# Altium PCB SpeakEasy_Power.PcbDoc
Units mil, origin at the board's own origin, x right, y up, seen from the top; angles counter-clockwise.
Board outline 3149.61 x 3149.61 mil, 2 copper layers (Top Layer, Bottom Layer), stack 62.8 mil thick; 38 components, 27 nets, 143 pads, 185 vias.
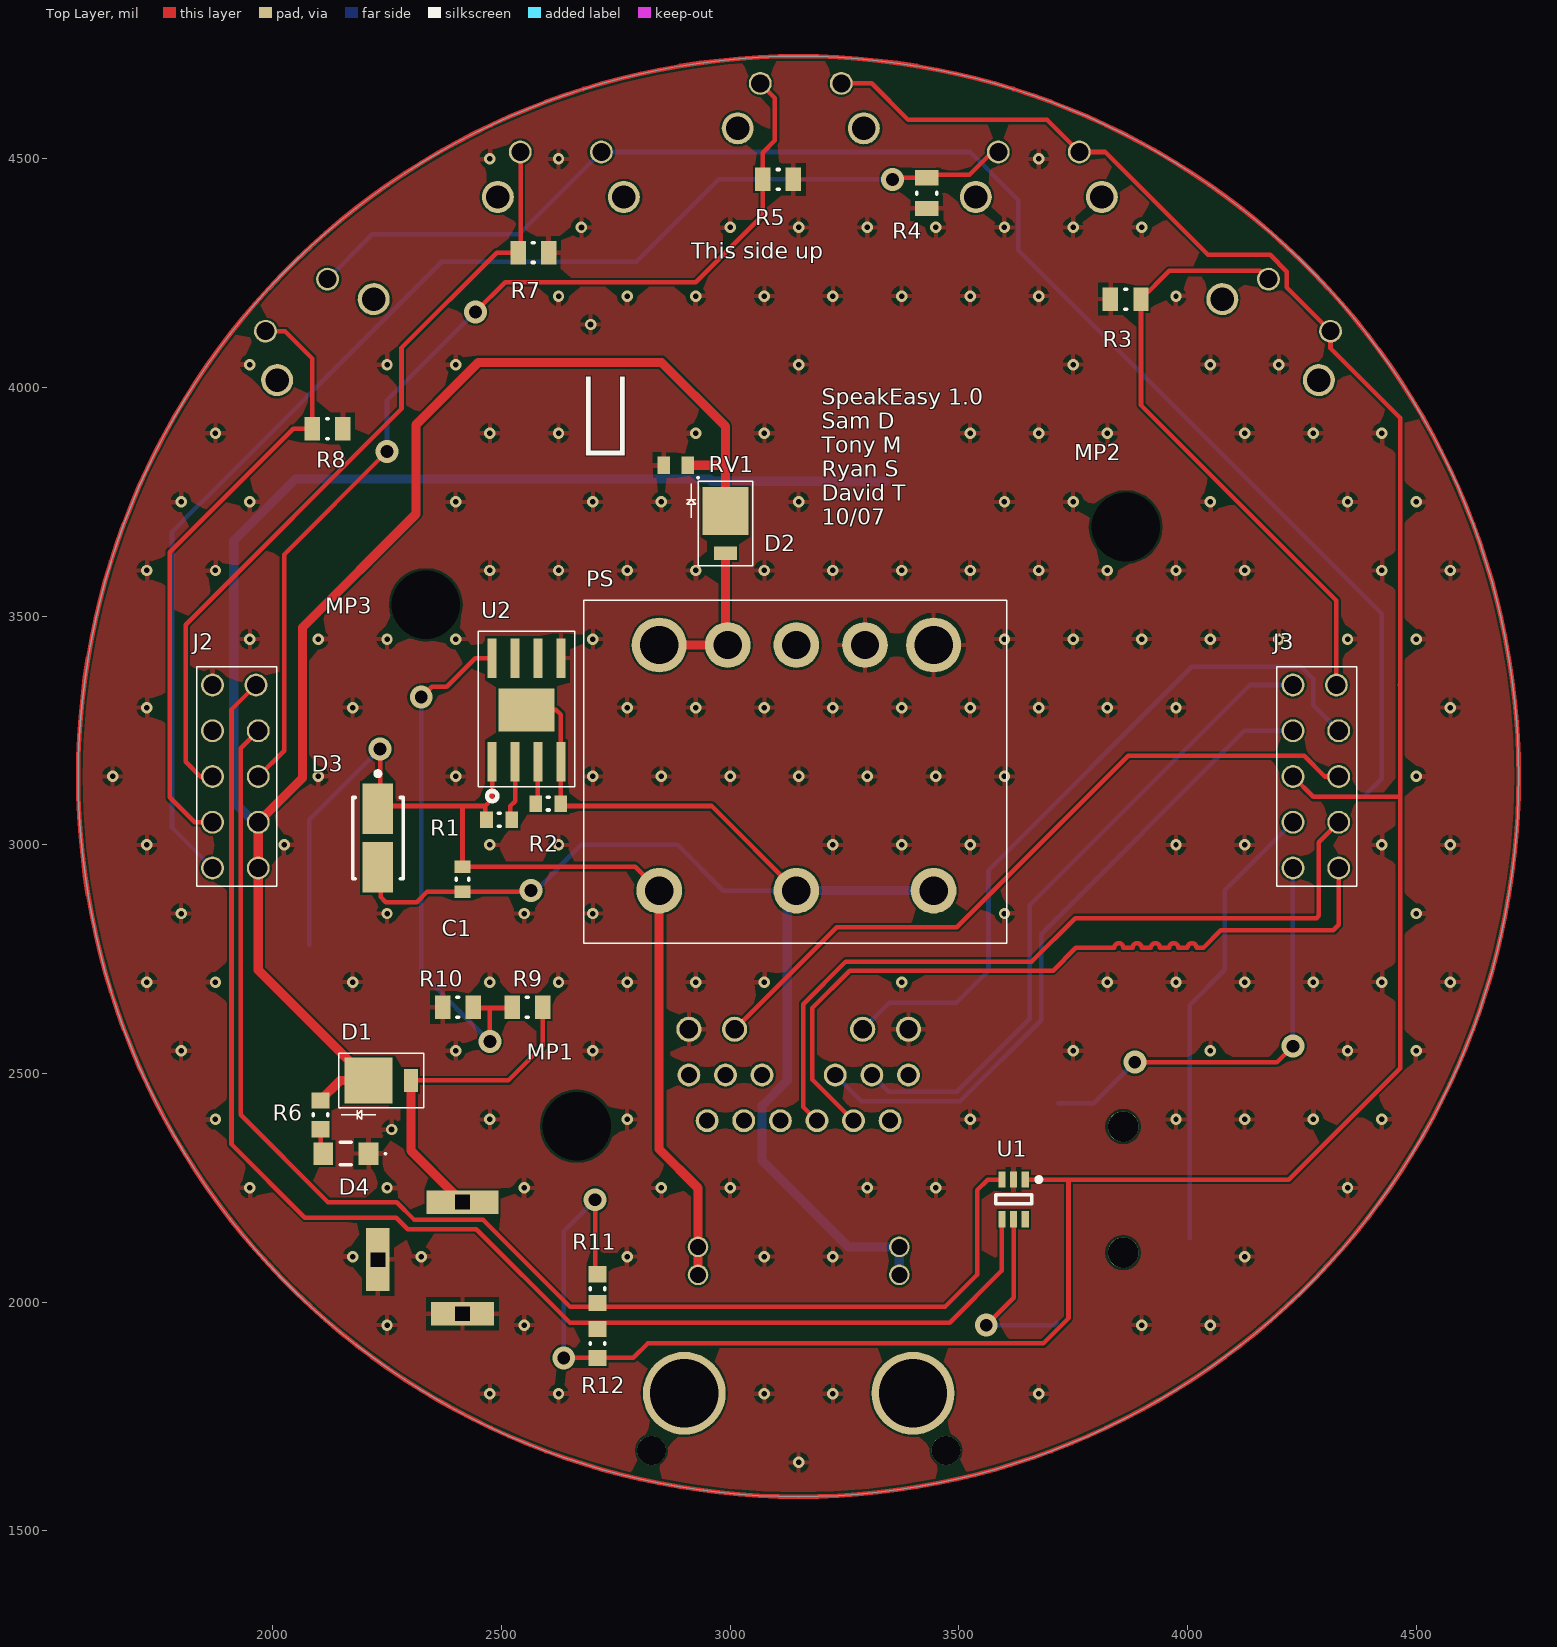
[diagram p0: Top Layer view]
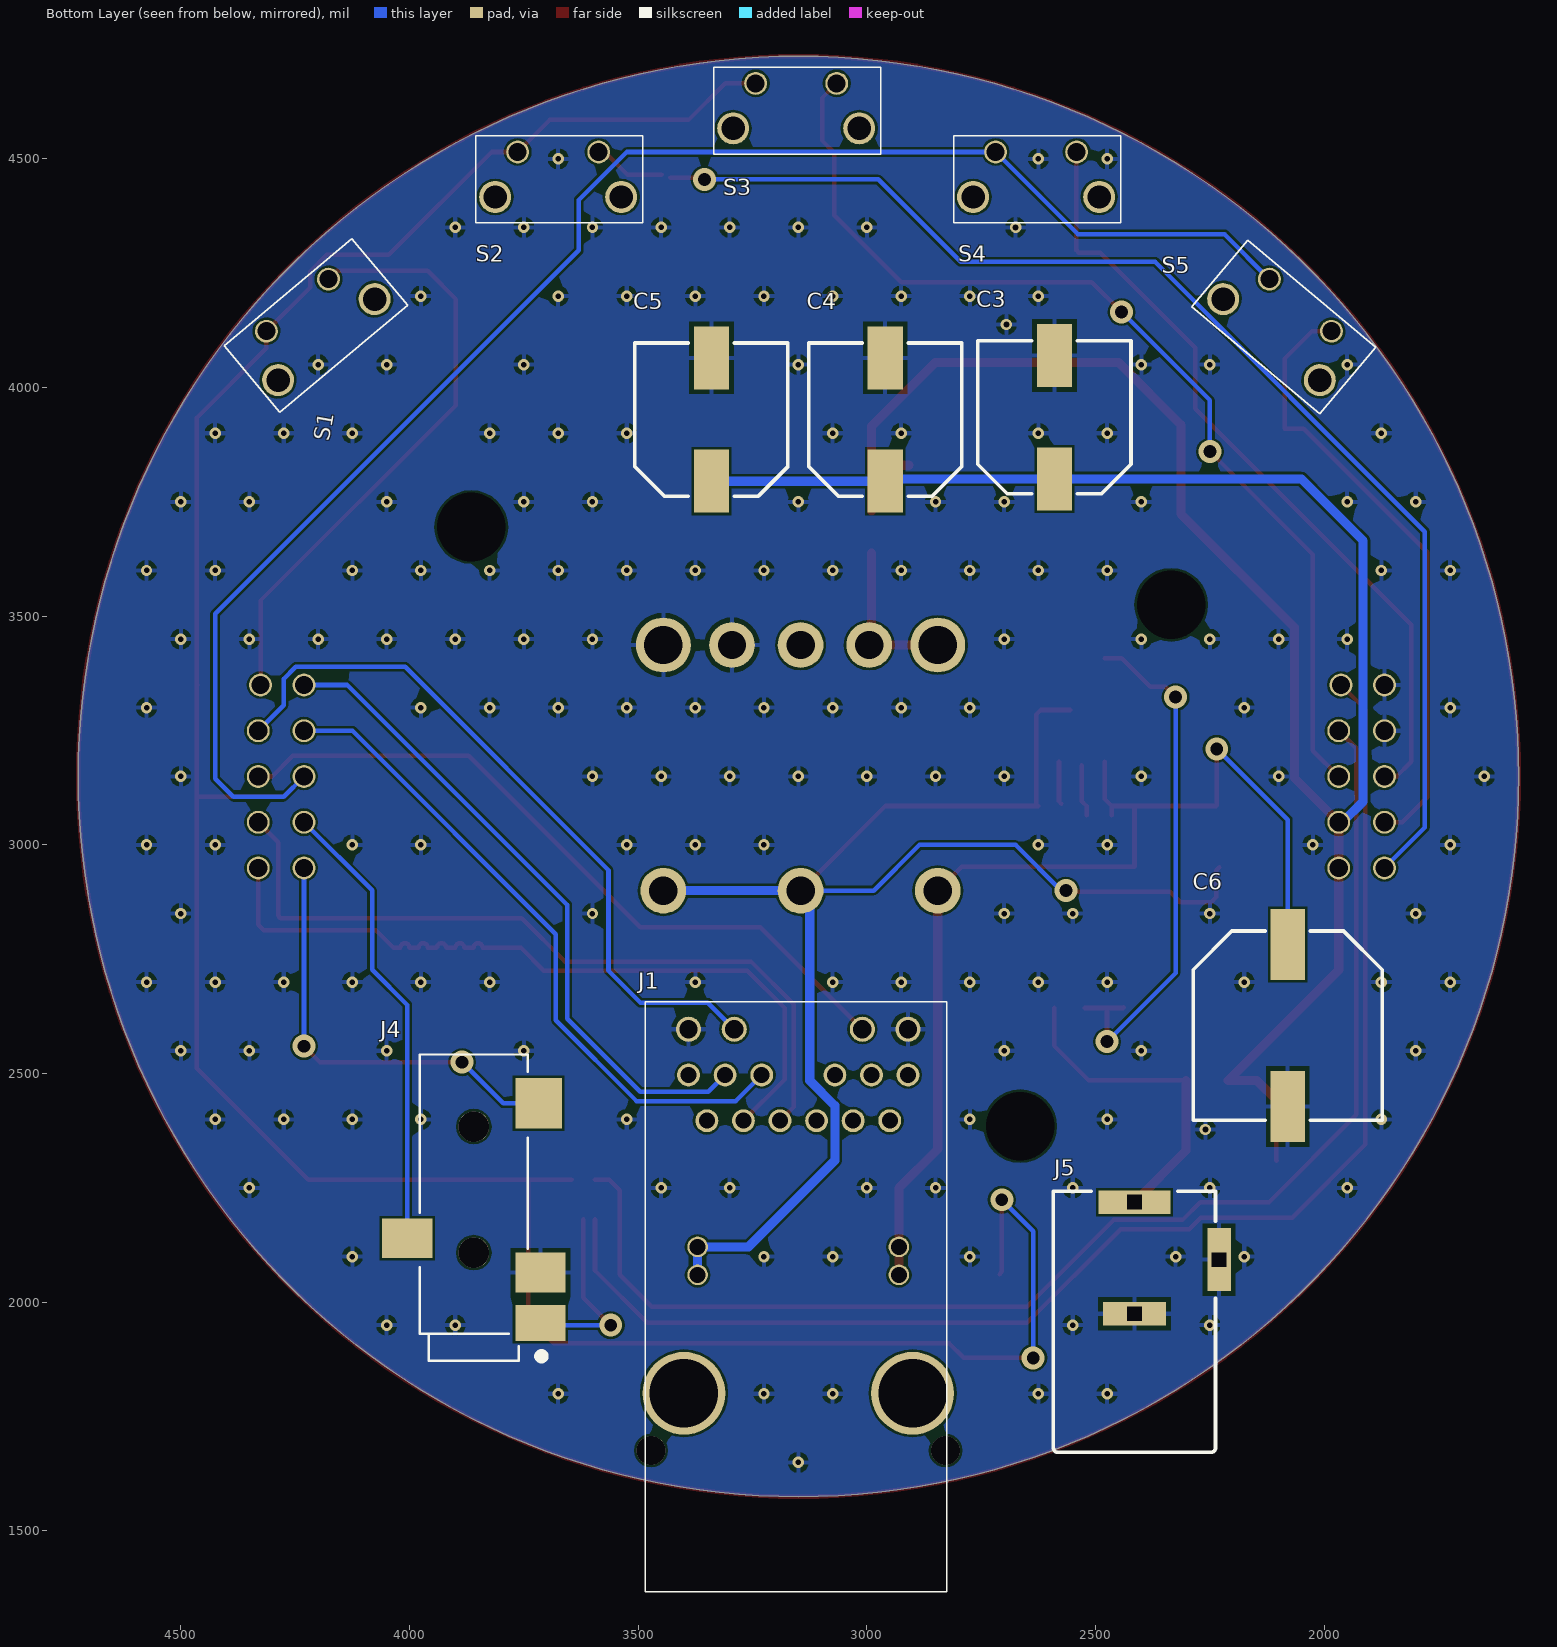
[diagram p1: Bottom Layer view, seen from below]
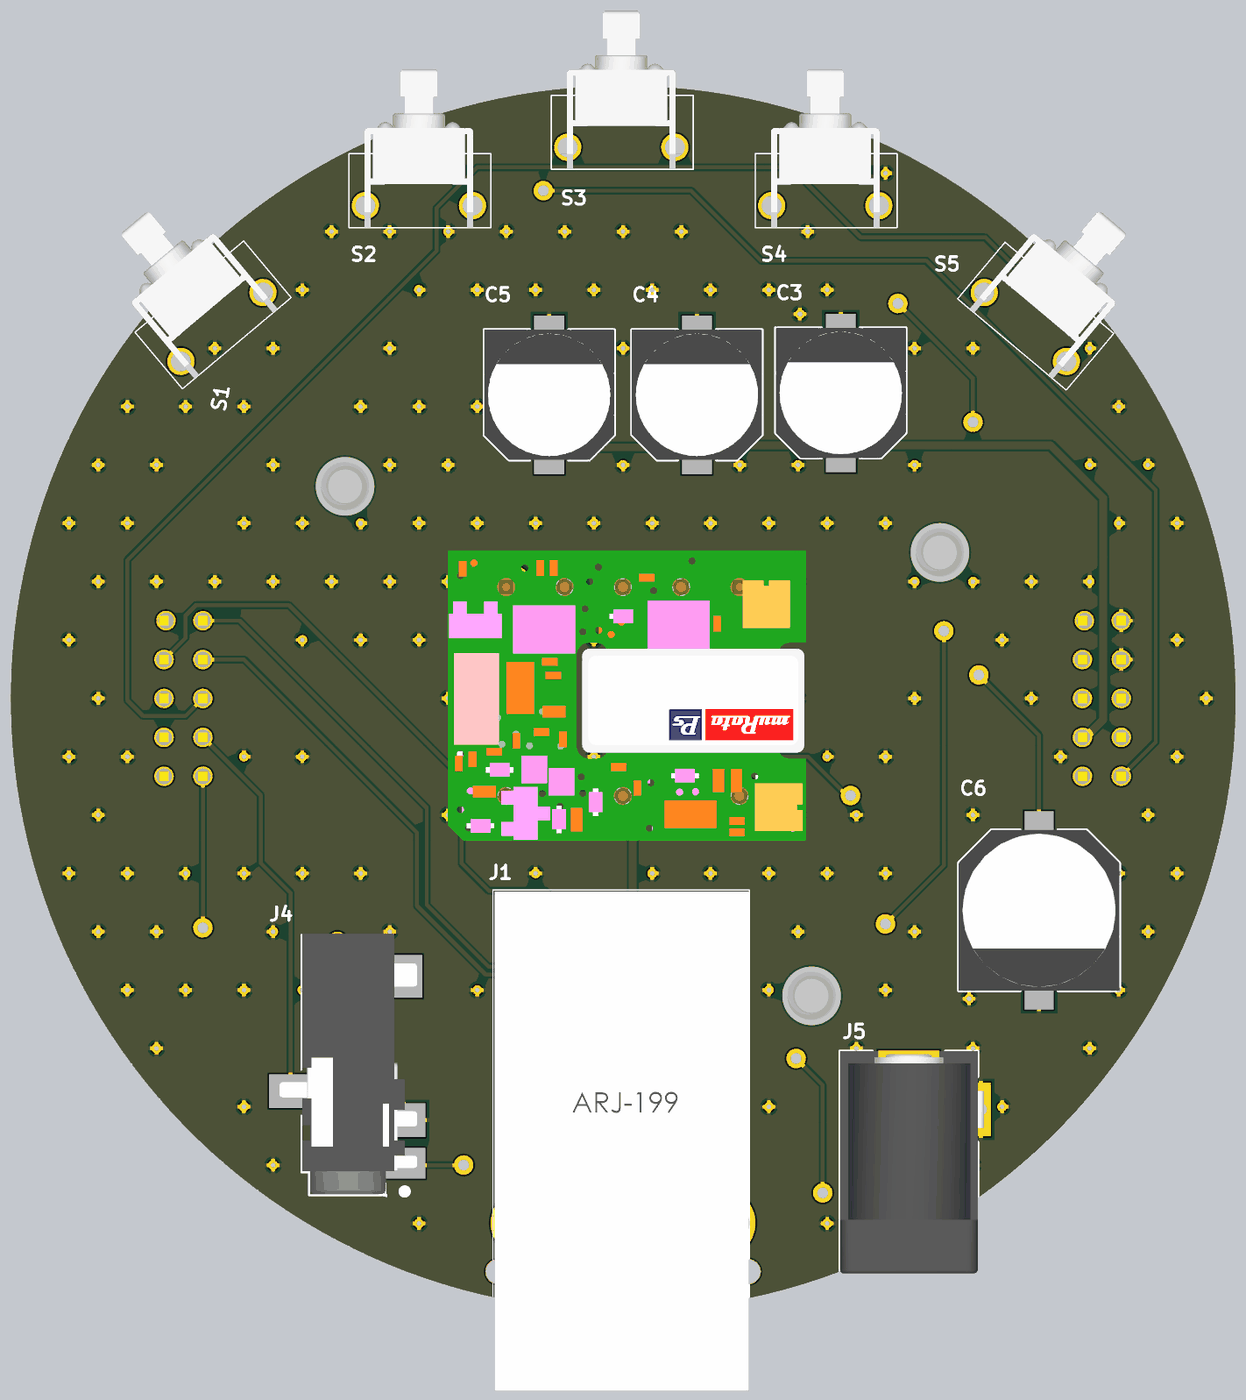
[diagram p2: 3D render of the assembled board from below, using the file's embedded part models]

## Layer stack, top to bottom
Top Solder: solder mask 0.4, Solder Resist, Dk 3.5
Top Layer: signal copper 1.4
Dielectric 1: dielectric 60, FR-4, Dk 4.8
Bottom Layer: signal copper 1.4
Bottom Solder: solder mask 0.4, Solder Resist, Dk 3.5

## Board outline
3149.61,1574.8 cw(c3149.61,3149.61) 1574.8,3149.61 cw(c3149.61,3149.61) 3149.61,4724.41 cw(c3149.61,3149.61) 4724.41,3149.61 cw(c3149.61,3149.61)

## Design rules (kind name [scope] priority, off if disabled: settings)
Clearance [All] p1: gap=5 ignorepadtopadclearanceinfootprint=FALSE except(0: SMDPad-Hole THPad-Hole Via-Hole Fill-Hole Poly-Hole Region-Hole Text-Hole)
DiffPairsRouting [All] p1: maxlimit=10 minlimit=10 mostfreqgap=10 toplayer_minwidth=3.5 toplayer_maxwidth=15 toplayer_prefwidth=15 bottomlayer_minwidth=3.5 bottomlayer_maxwidth=15 bottomlayer_prefwidth=15 maxuncoupledlength=500
HoleSize [All] p1: absolutevalues=TRUE maxlimit=200 minlimit=7.87 maxpercent=80.000 minpercent=20.000
MatchedLengths "Schematic Matched Net Lengths_3" [InNet('RD_P')] p1: tolerance=20 checknetsindiffpair=TRUE checkdiffpairvsdiffpair=FALSE checkxsignals=FALSE checkothers=FALSE
MatchedLengths "Schematic Matched Net Lengths_2" [InNet('TD_P')] p2: tolerance=20 checknetsindiffpair=TRUE checkdiffpairvsdiffpair=FALSE checkxsignals=FALSE checkothers=FALSE
MatchedLengths "Schematic Matched Net Lengths_1" [InNet('TD_N')] p3: tolerance=20 checknetsindiffpair=TRUE checkdiffpairvsdiffpair=FALSE checkxsignals=FALSE checkothers=FALSE
MatchedLengths "Schematic Matched Net Lengths" [InNet('RD_N')] p4: tolerance=20 checknetsindiffpair=TRUE checkdiffpairvsdiffpair=FALSE checkxsignals=FALSE checkothers=FALSE
MinimumAnnularRing [All] p1: minimumring=3
MinimumSolderMaskSliver [All] p1: minsoldermaskwidth=1
PolygonConnect [All] p1: connectstyle=Relief reliefconductorwidth=10 reliefentries=4 polygonreliefangle="90 Angle" airgapwidth=10
RoutingVias [All] p1: holewidth=20 width=30 viastyle="Through Hole" minholewidth=8 minwidth=18 maxholewidth=28 maxwidth=50
SilkToSolderMaskClearance [IsPad] p1: minsilkscreentomaskgap=5 clearancetoexposedcopper=TRUE
SolderMaskExpansion [All] p1: expansion=4
Width [All] p1: maxlimit=20 minlimit=3.5 preferedwidth=10 minimp=50.000000 maximp=50.000000 favimp=50.000000
26 further rules are at their usual default settings.

## Classes and differential pairs
differential pair class TX_DIFF: TD
differential pair class "RX Diff": RD
component class Designator: D1 J1 J2 J3 J4 J5 MP1 MP2 MP3 R3 R4 R5 R7 R8 R9 R10 R11 R12 S1 S2 S3 S4 S5 U1
differential pair TD: +TD_P -TD_N
differential pair RD: +RD_P -RD_N

## Components (designator, comment, footprint, x,y, rotation, side; value= is the part's Value field where it differs from the comment)
C1 ".1uF 100V" CAPC0603(1608)100_L 2415,2925 r270 top
C3 "UCL1V101MNL1GS" NIC-UCL1V101MNL1GS_L 2590,3935 r90 bottom
C4 "UCL1V101MNL1GS" NIC-UCL1V101MNL1GS_L 2960,3930 r90 bottom
C5 "UCL1V101MNL1GS" NIC-UCL1V101MNL1GS_L 3340,3930 r90 bottom
C6 "EEH-ZA1H101P" PNSC-ZA-G_L 2080,2605 r270 bottom
D1 "Shottkey Diode" DO-220AA 2210,2485 r0 top
D2 "Shottkey Diode" DO-220AA 2990,3730 r270 top
D3 "SMAJ58AHE3/5A" VISH-DO-214AC-2_M 2230,3015 r270 top
D4 "LTST-C171AKT" LTST-C171AKT_V 2160,2325 r0 top
J1 "ARJ-199" ARJ-199 2950,2397 r180 bottom
J2 "Stack Headers" TSW-105 1968.5,3149.61 r90 top locked
J3 "Stack Headers" TSW-105 4330.71,3149.61 r90 top locked
J4 "SJ-43514-SMT" CUI_SJ-43514-SMT 3859.33,2236.46 r90 bottom
J5 "KLDX-0202-A" KYCN-KLDX-0202-A_V 2415,1975 r90 bottom
MP1 "Standoff For Mounting" STO 2665,2385 r0 top
MP2 "Standoff For Mounting" STO 3865,3695 r0 top locked
MP3 "Standoff For Mounting" STO 2335,3525 r0 top
PS "ULT" ULT-12/2.5 3445,2900 r90 top
R1 "24.9K 1%" RESC0603(1608)_L 2495,3055 r180 top
R2 "63.4R 1%" RESC0603(1608)_L 2602.56,3090 r180 top
R3 "3.6k" RESC0805(2012)_L 3865,4193.18 r180 top
R4 "3.6k" RESC0805(2012)_L 3430,4425 r270 top
R5 "3.6k" RESC0805(2012)_L 3105,4455 r0 top
R6 "1k" RESC0603(1608)_N 2104.29,2410 r90 top value=1K
R7 "3.6k" RESC0805(2012)_L 2570.12,4295 r180 top
R8 "3.6k" RESC0805(2012)_L 2120,3910 r180 top
R9 "9.1k" RESC0805(2012)_L 2556.97,2645 r0 top
R10 "3.6k" RESC0805(2012)_L 2405,2645 r0 top
R11 "4.7k" RESC0603(1608)_N 2710,2030 r90 top value=4.7K
R12 "4.7K" RESC0603(1608)_N 2710,1910 r90 top
RV1 "EZJ-Z1V220JA MOV" DIOC1608X06N 2881.29,3830 r180 top
S1 "SPST Switch" TL1105 4245,4180 r320 bottom
S2 "SPST Switch" TL1105 3675,4515 r0 bottom
S3 "SPST Switch" TL1105 3154.61,4665 r0 bottom
S4 "SPST Switch" TL1105 2630,4515 r0 bottom
S5 "SPST Switch" TL1105 2052.14,4180 r40 bottom
U1 "TPL0401C-50DCKR" TI-DCK6_V 3620,2225 r270 top
U2 "TPS2378" 8SOPWR 2480,3181.81 r0 top

## Footprints (in the part's own frame and the unit in brackets; to place one, negate y for a bottom-side part, rotate by r counter-clockwise, add the part's x,y. Pads: shape width x height; smd on the part's side, far side on the other; paste and mask are expansions set on the pad)
8SOPWR [mm] "TI SO 8 w/ Power Pad"
  rect 0.5x2.2 smd: 1(0,0) 2(1.27,0) 3(2.54,0) 4(3.81,0) 5(3.81,5.75) 6(2.54,5.75) 7(1.27,5.75) 8(0,5.75)
  rect 3.1x2.4 smd: 4(1.905,2.875)
  silkscreen extent -0.76,-2.19 4.57,7.24, body extent -0.58,-0.1 4.32,5.68, height 1.45
ARJ-199 [mil] "MagJack for POE+ Applications"
  round 50 hole 35: 1(0,0) 2(-80,0) 3(-160,0) 4(-240,0) 5(-320,0) 6(-400,0) 7(40,100) 8(-40,100) 9(-120,100) 10(-280,100) 11(-360,100) 12(-440,100)
  round 45 hole 35: 13(20,-276) 14(-420,-276) 15(20,-337) 16(-420,-337)
  round 55 hole 40: 17(40,200) 18(-60,200) 19(-340,200) 20(-440,200)
  round 181.1 hole 149.61: H1(-450,-596) H2(50,-596)
  round 63 hole 63: H3(-522,-721) H4(122,-721)
  silkscreen extent -535,-1030 125,260, body extent -530,-1027 124,257, height 516
CAPC0603(1608)100_L [mm]
  rect 0.7x0.9 smd: 1(-0.7,0) 2(0.7,0)
  silkscreen extent -0.05,-0.35 0.05,0.35, body extent -0.87,-0.47 0.88,0.48, height 1
CUI_SJ-43514-SMT [mm]
  rect 2x2.8 smd: 1(-7.15,-3.7)
  rect 2.8x2.6 smd: 2(5.05,-3.6)
  rect 2.2x2.8 smd: 3(-2.45,3.7) 4(-4.35,-3.7)
  round 1.7 hole 1.7 unplated: None(-3.25,0) None(3.75,0)
  silkscreen extent -9.25,-3.95 7.75,3, body extent -9.36,-4.57 7.84,4.43, height 5.04
DIOC1608X06N [mm] "Chip Diode, 2-Leads, Body 1.55x0.85mm, IPC Medium Density"
  rect 0.7x0.95 smd: 1(-0.675,0) 2(0.675,0)
  silkscreen extent -1.29,0.64 -1.19,0.74, body extent -0.8,-0.45 0.8,0.45, height 0.6
DO-220AA [mil] "Diode Footprint"
  rect 105x100 smd: 1(0,0)
  rect 30x50 smd: 2(92.5,0)
  silkscreen extent -65,-85 120,60, body extent -47,-40 105,40, height 39
KYCN-KLDX-0202-A_V [mm]
  rect 1.3x4 hole 0.8 square: 1(6.2,0)
  rect 1.3x3.5 hole 0.8 square: 2(0,0)
  rect 3.5x1.3 hole 0.8 square: 3(3,-4.7)
  silkscreen extent -7.7,-4.5 6.8,4.5, body extent -7.7,-4.9 6.8,4.5, height 10.8
LTST-C171AKT_V [mm]
  rect 1.1x1.25 smd: A(-1.25,0) C(1.25,0)
  silkscreen extent -0.3,-0.63 2.25,0.63, body extent -1,-0.63 1,0.63, height 0.8
NIC-UCL1V101MNL1GS_L [mm] "Aluminum Electrolytic Capacitor, Body 8.5x8.5x10.80mm, IPC High Density"
  rect 3.5x1.95 smd: 1(-3.425,0) 2(3.425,0)
  silkscreen extent -4.25,-4.25 4.25,4.25, body extent -4.65,-4.25 4.65,4.25, height 10.8
PNSC-ZA-G_L [mm] "Aluminum Electrolytic Capacitor, Body 10.30x10.30x10.50mm, IPC High Density"
  rect 3.95x1.9 smd: 1(-4.5,0) 2(4.5,0)
  silkscreen extent -5.25,-5.25 5.25,5.25, body extent -6,-5.25 6,5.25, height 10.5
RESC0603(1608)_L [mm]
  rect 0.7x0.9 smd: 1(-0.7,0) 2(0.7,0)
  silkscreen extent -0.05,-0.35 0.05,0.35, body extent -0.85,-0.47 0.85,0.47, height 0.6
RESC0603(1608)_N [mm] "Chip Resistor, Body 1.6x0.8mm, IPC Medium Density"
  rect 0.9x1 smd: 1(-0.8,0) 2(0.8,0)
  silkscreen extent -0.05,-0.4 0.05,0.4, body extent -0.85,-0.47 0.85,0.47, height 0.6
RESC0805(2012)_L [mm]
  rect 0.85x1.3 smd: 1(-0.85,0) 2(0.85,0)
  silkscreen extent -0.05,-0.55 0.05,0.55, body extent -1.1,-0.67 1.1,0.68, height 0.7
STO [mil]
  round 50 hole 150: ST(0,0)
  body extent -119,-119 119,119, height 70
TI-DCK6_V [mm] "SOT23, 6-Leads, Body 2x1.25mm, Pitch 0.65mm"
  rect 0.9x0.4 smd: 1(-1.1,0.65) 2(-1.1,0) 3(-1.1,-0.65) 4(1.1,-0.65) 5(1.1,0) 6(1.1,0.65)
  silkscreen extent -1.22,-1 0.25,1.53, body extent -0.63,-1 0.63,1, height 1.1
TL1105 [mm] "Right Angle button footprint"
  round 1.27 hole 1: 1(-2.25,0) 2(2.25,0)
  round 1.778 hole 1.3: NONE(-3.5,2.5) NONE(3.5,2.5)
  silkscreen extent -4.7,-0.89 4.57,3.94, body extent -4.2,-6.41 4.2,3.94, height 7.11
TSW-105 [mil] "For use in the stack as the upfacing connection"
  round 50 hole 40: 1(-200,0) 2(-100,0) 3(0,0) 4(100,0) 5(200,5) 6(200,100) 7(100,100) 8(0,100) 9(-100,100) 10(-200,100)
  silkscreen extent -240,-40 240,135, body extent -250,-50 250,150, height 330
ULT-12/2.5 [mil] "ULT 1/32 Brick DC/DC"
  round 100 hole 62: 1(0,600) 2(0,300) 3(0,0) 5(537,150) 6(537,300) 7(537,450)
  round 120 hole 84: 4(537,0) 8(537,600)
  silkscreen extent -115,-160 635,765, body extent -116,-156 630,765, height 173
VISH-DO-214AC-2_M [mm] "DO-214AC, 2-Leads, Body 4.5x2.79mm, IPC Low Density"
  rect 2.8x1.7 smd: 1(-1.625,0) 2(1.625,0)
  silkscreen extent -3.7,-1.4 2.25,1.4, body extent -2.25,-1.39 2.25,1.4, height 2.29

## Part data
C1: library part CMP-1590-00005-1, "0.1µF ±10% 100V Ceramic Capacitor X7S 0603 (1608 Metric)", Case-EIA=0603, Case-Metric=1608, PackageReference=CAPC0603(1608)100
C3 C4 C5: library part CMP-2000-07344-1, "Aluminum Electrolytic Capacitor, 100 uF, 35 V, 20%, -55 to 105 degC, 2-Pin SMD, RoHS, Tape and Reel", Capacitance=100uF, Case Diameter=8mm, Case Height=8.3mm, Case Length=10mm, Leakage Current=3uA, Manufacturer=Nichicon, Maximum Operating Temperature=+105C, Minimum Operating Temperature=-55C, Operating Temperature Range=-55Cto+105C, Package Description="2-Pin Surface Mount Device, Body 8.3 x 8.3 mm, Height 10.8 mm", Ripple Current=850mA, Tolerance=20%, Voltage Rating=35V, Brand=Nichicon, Datasheet URL=http://datasheet.octopart.com/UCL1V101MNL1GS-Nichicon-datasheet-41194108.pdf, Datasheet Version=01/2015, Dimensions=8mmDia.x10mmLx8.3mmH, Dissipation Factor DF=0.12, Factory Pack Quantity=500, Load Life=2000h, Manufacturer URL=http://www.nichicon.co.jp/english/, Mounting Technology=SurfaceMount, Package Reference=UCL1V101MNL1GS, Packaging=Reel, Product=LowImpedanceElectrolyticCapacitors, Product Category=AluminumElectrolyticCapacitors-SMD, RoHS=Details, Series=CL, Termination Style=SMD/SMT, Type=AluminumElectrolyticCapacitors,ChipType,LowImpedance, Voltage Rating DC=35V
C6: library part CMP-2000-06221-1, "Conductive Polymer Hybrid Aluminum Electrolytic Capacitor, 100 uF, +/- 20%, 50 V, -55 to 105 degC, 2-Pin SMD (G), RoHS, Tape and Reel", Capacitance=100uF, Case Diameter=10mm, Case Height=10.5mm, Case Length=10.2mm, Manufacturer=Panasonic, Maximum Operating Temperature=+105C, Minimum Operating Temperature=-55C, Package Description="2-Pin Surface Mount Device, Body 10.3 x 10.3 mm", Package Reference=ZA-G, Ripple Current=2A, Tolerance=20%, Voltage Rating DC=50V, Brand=Panasonic, Datasheet URL=https://industrial.panasonic.com/cdbs/www-data/pdf/RDD0000/DMD0000COL56.pdf, Datasheet Version=06/2016, ESR=28mOhms, Factory Pack Quantity=500, Height=10.5mm, Load Life=10000Hour, Manufacturer URL=http://www.panasonic.com/, Mounting Technology=SurfaceMount, Packaging=Reel, Product=AluminumElectrolyticCapacitors, Product Category=AluminumOrganicPolymerCapacitors, RoHS=Details, Series=ZA, Termination Style=SMD/SMT
D1 D2: library part V3P6, ComponentLink1Description=Datasheet, ComponentLink1URL=https://www.vishay.com/docs/89344/v3p6.pdf
D3: library part CMP-0548-00176-1, "Transient Voltage Suppressor, 6.40 to 231 V, 58 V Stand-off Voltage, Uni-Directional, -55 to 155 degC, 2-pin DO-214AC, Pb-Free, Tape and Reel", Manufacturer="Vishay Semiconductor", Operating Junction and Storage Temperature Range="-55 to 150 degC", ComponentLink1Description="Manufacturer URL", ComponentLink1URL=http://www.vishay.com/, ComponentLink2Description=Datasheet, ComponentLink2URL=http://www.vishay.com/docs/88390/smaj50a.pdf, ComponentLink3Description="Package Specification", ComponentLink3URL=http://www.vishay.com/docs/88390/smaj50a.pdf, DatasheetVersion=12/8/2013, ID (uA)=1, IFSM="40 A", Mounting Technology="Surface Mount", PackageDescription="2-Pin DO-214AC (SMA), Body 4.245 x 2.665 mm", PackageReference=DO-214AC-2, Packing="Tape and Reel", PartNumber=SMAJ58AHE3/5A, PPPM (W)="400, 300", RoHS=TRUE, VBR Uni-Directional (V)="6.4 to 231", VWM (V)=58
D4: library part CMP-1674-00004-3, "LED AMBER CLR THIN 0805 SMD", Manufacturer=Lite-On, ComponentLink1Description=Datasheet, ComponentLink1URL=http://optoelectronics.liteon.com/upload/download/DS-22-99-0170/S_110_LTST-C171AKT.pdf, PackageReference=C171AKT, PartNumber=LTST-C171AKT
J1: "MagJack POE+ Jack"
J5: library part CMP-1673-00001-1, "DC Power Connectors 2mm PCB JACK POWER JACK", ComponentLink1Description=Datasheet, ComponentLink1URL=http://www.mouser.com/ds/2/222/KLDX_0202_LT-334784.pdf, PackageReference=KLDX-0202-A, PartNumber=KLDX-0202-A
MP1 MP2 MP3: library part Standoff
PS: "+12V/2.5A DC/DC Converter, requires 36-75V input to power on.", ComponentLink1Description=Datasheet, ComponentLink1URL=https://power.murata.com/data/power/ult.pdf
R1 R2: library part CMP-1591-00001-1, "0603 (1608 Metric) Chip Resistor", Case-EIA=0603, Case-Metric=1608, PackageReference=RESC0603(1608)
R3 R4 R5 R7 R8 R9 R10: library part CMP-1591-00002-1, "0805 (2012 Metric) Chip Resistor", Case-EIA=0805, Case-Metric=2012, PackageReference=RESC0805(2012)
R6 R12: library part CMP-1012-00122-1, Case-EIA=0603, Case-Metric=1608, Power="0.1 W", Tolerance="5 %", Technology=SMT
R11: library part CMP-1012-00122-1, "100K 0.1W 5% 0603 (1608 Metric)  SMD", Case-EIA=0603, Case-Metric=1608, Power="0.1 W", Tolerance="5 %", Technology=SMT
RV1: library part EZJ-Z1V220JA, "Voltage Supression", ComponentLink1Description=Datasheet, ComponentLink1URL=https://industrial.panasonic.com/cdbs/www-data/pdf/AWC0000/AWC0000C55.pdf
U1: library part CMP-0004-00347-1, "128 Tap Digital Potentiometer with I2C Interface, -40 to 125 degC, 6-pin SOT23 (DCK6)", Manufacturer="Texas Instruments", Code_JEDEC=MO-203, ComponentLink1Description="Manufacturer URL", ComponentLink1URL=http://www.ti.com/, ComponentLink2Description=Datasheet, ComponentLink2URL=http://www.ti.com/general/docs/lit/getliterature.tsp?genericPartNumber=TPL0401C-50&fileType=pdf, ComponentLink3Description="Package Specification", ComponentLink3URL=http://www.ti.com/litv/pdf/mpds114c, DatasheetVersion=SLIS144A, DNL(Max)(+/-LSB)=0.25, INL(Max)(+/-LSB)=0.5, Interface=I2C, Mounting Technology="Surface Mount", PackageDescription="6-Pin Plastic Small Outline, Body 2 x 1.25 mm, Pitch 0.65 mm", PackageReference=DCK6, PackageVersion="4093553-4/G, 01/2007", PartNumber=TPL0401C-50DCKR, Settling Time(us)=0.152, SubFamily="Digital Potentiometer"
U2: "POE Manager IC", ComponentLink1Description=Datasheet, ComponentLink1URL=http://www.ti.com/lit/ds/symlink/tps2378.pdf
J2 J3: System=Connector

## Via types
v1: diameter 25, hole 12, Top Layer to Bottom Layer, 170 vias
v2: diameter 50, hole 28, Top Layer to Bottom Layer, 12 vias
v3: diameter 25, hole 13, Top Layer to Bottom Layer, 3 vias

## Nets (pads, with @x,y where several pads share a name; then routed paths per layer and width w, separated by ;. In a path a pad name is that pad's centre, name@x,y a point inside that pad or via, vN(x,y) a via of type N, cw(c..) or ccw(c..) an arc to the next point about the centre after c; other vN are vias at no path point)
+3V3: J3.8 R11.2 R12.1 S1.2 S2.2 S3.2 S4.2 S5.2 U1.1 | length 9644.8
  Top Layer w10: S5.2 S5.2@2126.24,4243.18 ; v2(2636.5,1878.5) R12.1 2788.5,1878.5 2820,1910 3685,1910 3740,1965 3740,2268.31 ; v2(2705,2224.09) 2705,2066.5 R11.2 ; S3.2 3310,4665 3390,4585 3693.58,4585 S2.2 3820,4515 4045,4290 4180.65,4290 4217.14,4253.51 4217.14,4218.78 S1.2 4312.86,4085.6 4465,3933.46 4465,3350 ; U1.1 3740,2268.31 ; J3.8 4275.31,3105 4465,3105 ; 4464.61,3349.61 4465,3350 ; 3740,2268.31 4221.59,2268.31 4465,2511.72 4465,3105 ; 4465,3105 4465,3350
  Bottom Layer w10: S5.2 2218.06,4335 2538.58,4335 S4.2 3525,4515 3630,4410 3630,4300 4425,3505 4425,3145 4385,3105 4275.31,3105 J3.8 ; v2(2636.5,1878.5) 2636.5,2155.59 v2(2705,2224.09)
+12V: C3.1 C4.1 C5.1 D1.1 D2.1 J2.1 J2.2 R6.2 RV1.1 | length 4983.7
  Top Layer w20: R6.2 2147.8,2485 D1.1 1968.5,2726.5 J2.1 J2.2 2065,3146.1 2065,3475 2313.46,3723.46 2313.46,3918.46 2450,4055 2850,4055 2990,3915 2990,3830 ; RV1.1 2990,3830 ; D2.1 2990,3830
  Bottom Layer w20: J2.2 1960.39,3049.61 1915,3095 1915,3665 2050.16,3800.16 C3.1 2955,3800.16 C4.1 C5.1
+POE: C1.1 C6.1 D3.1 J1.13 J1.15 PS.1 R1.2 U2.1 | length 2426.1
  Top Layer w10: v2(2235,3210) 2235,3086.02 2236.02,3085 2464.65,3085 ; 2415,3082.44 C1.1 2792.44,2952.56 PS.1 ; R1.2@2464.65,3065 2464.65,3085 ; U2.1 2480,3100.35 2464.65,3085
  Top Layer w20: PS.1 2845,2335 2930,2250 J1.13 J1.15
  Bottom Layer w10: C6.1 2080,3055 v2(2235,3210)
ADP: R9.1 R10.2 U2.8 | length 1166.7
  Top Layer w10: v2(2325,3323.19) 2347.5,3345.69 2380.69,3345.69 2443.19,3408.19 U2.8 ; R10.2 2440.12,2643.35 2480,2643.35 ; v2(2475,2570) 2475,2638.35 2480,2643.35 ; R9.1@2523.5,2643.35 2480,2643.35
  Bottom Layer w10: v2(2325,3323.19) 2325,2720 v2(2475,2570)
AUX_CTRL: J4.1 U1.5 | length 412.3
  Top Layer w10: v2(3560,1950) 3620,2010 U1.5
  Bottom Layer w10: v2(3560,1950) 3708.7,1950 J4.1
AUX_L: J3.10 J4.2 | length 954.4
  Top Layer w10: v2(3885,2525) 4195.71,2525 v2(4230.71,2560)
  Bottom Layer w10: J4.2 3795.28,2435.28 v2(3885,2525) ; v2(4230.71,2560) J3.10
AUX_R: J3.9 J4.3 | length 1003.1
  Bottom Layer w10: J4.3 4005,2650 4081.78,2726.78 4081.78,2900.68 J3.9
Button_VD: J2.9 R8.2 S5.1 | length 1355.8
  Top Layer w10: J2.9 1829.37,3049.61 1775,3103.98 1775,3640 2045,3910 R8.2 2086.54,4063.46 2026.94,4123.06 S5.1
Button_VU: J2.8 R7.2 S4.1 | length 1736.5
  Top Layer w10: J2.8 1842.09,3149.61 1810,3181.69 1810,3481.61 2281.73,3953.35 2281.73,4086.8 2489.93,4295 R7.2 2541.42,4299.76 2542.2,4299.76 2542.2,4514.21 S4.1
GND: C3.2 C4.2 C5.2 C6.2 D4.C J1.17 J1.20 J2.6 J2.7 J4.4 J5.2 J5.3 PS.4 PS.5 R3.2 R4.2 R5.2 R7.1 R8.1 R10.1 RV1.2 U1.2 U2.5
  other v1: 3150,1650 2475,1800 2625,1800 3075,1800 3225,1800 3675,1800 2250,1950 2550,1950 3900,1950 4050,1950 2175,2100 2325,2100 2775,2100 3075,2100 3225,2100 4125,2100 1950,2250 2250,2250 2550,2250 2850,2250 3000,2250 3300,2250 3450,2250 4350,2250 1875,2400 2475,2400 2775,2400 3525,2400 3975,2400 4125,2400 4275,2400 4425,2400 1800,2550 2400,2550 2700,2550 3750,2550 4050,2550 4350,2550 4500,2550 1725,2700 1875,2700 2175,2700 2475,2700 2625,2700 2775,2700 2925,2700 3075,2700 3375,2700 3825,2700 3975,2700 4125,2700 4275,2700 4425,2700 4575,2700 1800,2850 2250,2850 2550,2850 2700,2850 3600,2850 4500,2850 1725,3000 2025,3000 2475,3000 2625,3000 3225,3000 3375,3000 3525,3000 3975,3000 4125,3000 4425,3000 4575,3000 1650,3150 2100,3150 2400,3150 2700,3150 2850,3150 3000,3150 3150,3150 3300,3150 3450,3150 3600,3150 4500,3150 1725,3300 2175,3300 2775,3300 2925,3300 3075,3300 3225,3300 3375,3300 3525,3300 3675,3300 3825,3300 3975,3300 4575,3300 1950,3450 2100,3450 2250,3450 2400,3450 2700,3450 3600,3450 3750,3450 3900,3450 4050,3450 4200,3450 4350,3450 4500,3450 1725,3600 1875,3600 2475,3600 2625,3600 2775,3600 2925,3600 3075,3600 3225,3600 3375,3600 3525,3600 3675,3600 3825,3600 3975,3600 4125,3600 4425,3600 4575,3600 1800,3750 1950,3750 2400,3750 2700,3750 2850,3750 3150,3750 3600,3750 3750,3750 4050,3750 4350,3750 4500,3750 1875,3900 2475,3900 2625,3900 2925,3900 3075,3900 3525,3900 3675,3900 3825,3900 4125,3900 4275,3900 4425,3900 1950,4050 2250,4050 2400,4050 3150,4050 3750,4050 4050,4050 4200,4050 2625,4200 2775,4200 2925,4200 3075,4200 3225,4200 3375,4200 3525,4200 3675,4200 3975,4200 3000,4350 3150,4350 3300,4350 3450,4350 3600,4350 3750,4350 3900,4350 2475,4500 2625,4500 3675,4500
  other v3: 2260,2377.8 2695,4137.82 2675,4350
I2C1_SCL: J2.4 R11.1 U1.3 | length 2917.6
  Top Layer w10: J2.4 1930,3211.1 1930,2410 2120.91,2219.09 2270.91,2219.09 2310,2180 2460,2180 2650,1990 3470,1990 3540,2060 3540,2245 3563.31,2268.31 U1.3
I2C1_SDA: J2.5 R12.2 U1.4 | length 3032.2
  Top Layer w10: J2.5 1910,3296.1 1910,2345.39 2070.39,2185 2270,2185 2295,2160 2445,2160 2650,1955 3480,1955 3594.41,2069.41 U1.4
LED_ACT: J1.18 J3.3 | length 1587.2
  Top Layer w10: J1.18 3233,2820 3495.39,2820 3870.39,3195 4255,3195 4300.39,3149.61 J3.3
LED_LINK: J1.19 J3.4 | length 1589.8
  Bottom Layer w10: J1.19 3348,2655 3495,2655 3565,2725 3565,2945 4009.61,3389.61 4248.55,3389.61 4275.31,3362.85 4275.31,3305 J3.4
NetD1_2: D1.2 J5.1 R9.2 | length 721.7
  Top Layer w10: D1.2 2515,2485 2590.43,2560.43 R9.2@2590.43,2643.35
  Top Layer w20: D1.2 2302.5,2331.59 J5.1
  Bottom Layer w20: J5.1@2410,2224.09 J5.1
NetD2_2: D2.2 PS.7 PS.8 | length 352.6
  Top Layer w20: PS.8 PS.7 2990,3442 D2.2
NetD4_A: D4.A R6.1 | length 70.3
  Top Layer w10: D4.A@2104.29,2309.21 2105,2309.21 2105,2377.8 R6.1
NetR1_1: R1.1 U2.2 | length 113.3
  Top Layer w10: R1.1@2519.76,3065 2519.76,3085 2530,3095.24 U2.2@2530,3174.02
NetR2_2: R2.2 U2.3 | length 93.9
  Top Layer w10: R2.2 2580,3095 U2.3
PB_Next: J3.5 R3.1 S1.1 | length 1332.3
  Top Layer w10: S1.1 4159.08,4255 3960.29,4255 R3.1 3898.46,3961.54 4325.71,3534.29 J3.5
PB_PP: J2.10 R4.1 S2.1 | length 2888.1
  Top Layer w10: v2(3355,4455) 3358.46,4458.46 R4.1 ; R4.1@3448.46,4465 3523.46,4465 S2.1@3573.46,4515
  Bottom Layer w10: J2.10 1780,3038.11 1780,3685 2370,4275 2795,4275 2975,4455 v2(3355,4455)
PB_PREV: J2.3 R5.1 S3.1 | length 2240.7
  Top Layer w10: J2.3 2025,3206.1 2025,3635 v2(2250,3860) ; v2(2443.19,4165) 2508.19,4230 2925,4230 3071.54,4376.54 R5.1 3071.54,4513.46 3098.07,4540 3098.07,4632.95 S3.1
  Bottom Layer w10: v2(2250,3860) 2250,3971.81 v2(2443.19,4165)
RD_N: J1.5 J3.1 | length 1690.7
  Top Layer w10: J1.5 3180,2487 3180,2643.35 3261.65,2725 3706.22,2725 3756.22,2775 3800,2775 3820,2775 3840,2775 cw(c3850,2775) 3860,2775 3880,2775 cw(c3890,2775) 3900,2775 3920,2775 cw(c3930,2775) 3940,2775 3960,2775 cw(c3970,2775) 3980,2775 4000,2775 cw(c4010,2775) 4020,2775 4035,2775 4073.25,2813.25 4318.76,2813.25 4330.71,2825.2 4330.71,2934.61 4344.05,2934.61 J3.1@4344.88,2935.44
RD_P: J1.4 J3.2 | length 1697
  Top Layer w10: J1.4 3160,2427 3160,2651.63 3253.37,2745 3660,2745 3755,2840 4282.28,2840 4287.29,2845.02 4287.29,3006.19 J3.2
TD_N: J1.10 J3.7 | length 1470.2
  Bottom Layer w10: J1.10 3287,2440 3503.68,2440 3680,2616.32 3680,2805 4124.61,3249.61 J3.7
TD_P: J1.11 J3.6 | length 1450.5
  Bottom Layer w10: J1.11 3347,2460 3495.39,2460 3655,2619.61 3655,2868.72 4135.88,3349.61 J3.6
VSS: C1.2 D3.2 J1.14 J1.16 PS.2 PS.3 R2.1 U2.4 | length 3310.2
  Top Layer w10: D3.2 2236.02,2945 2236.02,2886.02 2247.05,2875 2315,2875 2337.44,2897.44 C1.2 2562.44,2897.44 v2(2565,2900) ; U2.4@2555,3295 2620,3295 2630,3285 U2.4@2630,3181.81 ; R2.1@2625,3085 2960,3085 PS.2 ; R2.1 U2.4@2630.12,3186.69
  Bottom Layer w10: v2(2565,2900) 2575,2900 2675,3000 2885,3000 2985,2900 PS.2
  Bottom Layer w20: J1.16 J1.14 3259,2121 3070,2310 3070,2430 3125,2485 3125,2880 PS.2 PS.3
pads on no net: J1.1 J1.2 J1.3 J1.6 J1.7 J1.8 J1.9 J1.12 J1.H1 J1.H2 J1.H3 J1.H4 J4.None MP1.ST MP2.ST MP3.ST PS.6 S1.NONE S2.NONE S3.NONE S4.NONE S5.NONE U1.6 U2.6 U2.7
copper on no net: | length 9894.8
  Top Layer w10: 4724.41,3149.61 ccw(c3149.61,3149.61) 4724.41,3149.61

## Polygon pours and split planes (outlines as drawn)
GND on Top Layer "GND_L01_P002" (solid, remove dead copper, pour order 2): 2145,2425 2147.06,2422.94 2278.49,2422.94 2278.49,2331.48 2271.19,2324.19 2145,2324.19
GND on Top Layer "GND_L01_P000" (solid, remove dead copper, pour order 0): 3149.61,1574.8 cw(c3149.61,3149.61) 1574.8,3149.61 cw(c3149.61,3149.61) 3149.61,4724.41 cw(c3149.61,3149.61) 4724.41,3149.61 cw(c3149.61,3149.61)
no net on Top Layer "Top Layer-No Net" (solid, pour order 4): 2147.06,2422.94 2145,2425
GND on Bottom Layer "GND_L02_P001" (solid, remove dead copper, pour order 1): 3149.61,1574.8 cw(c3149.61,3149.61) 1574.8,3149.61 cw(c3149.61,3149.61) 3149.61,4724.41 cw(c3149.61,3149.61) 4724.41,3149.61 cw(c3149.61,3149.61)

## Silkscreen, mask and mechanical layers (free items; w line width, h text height)
Top Overlay:
  text "This side up" at 2915,4270 h60
  text "" at 2675,3775 h400
  text "SpeakEasy 1.0 / Sam D / Tony M / Ryan S / David T / 10/07" at 3200,3700 h35